# Altium PCB main_board4_PCB50Binary_2018-03-27.PcbDoc
Units mm, origin at the board's own origin, x right, y up, seen from the top; angles counter-clockwise.
Board outline 60.01 x 79.7 mm, 2 copper layers (Top Layer, Bottom Layer); 83 components, 64 nets, 366 pads, 23 vias.
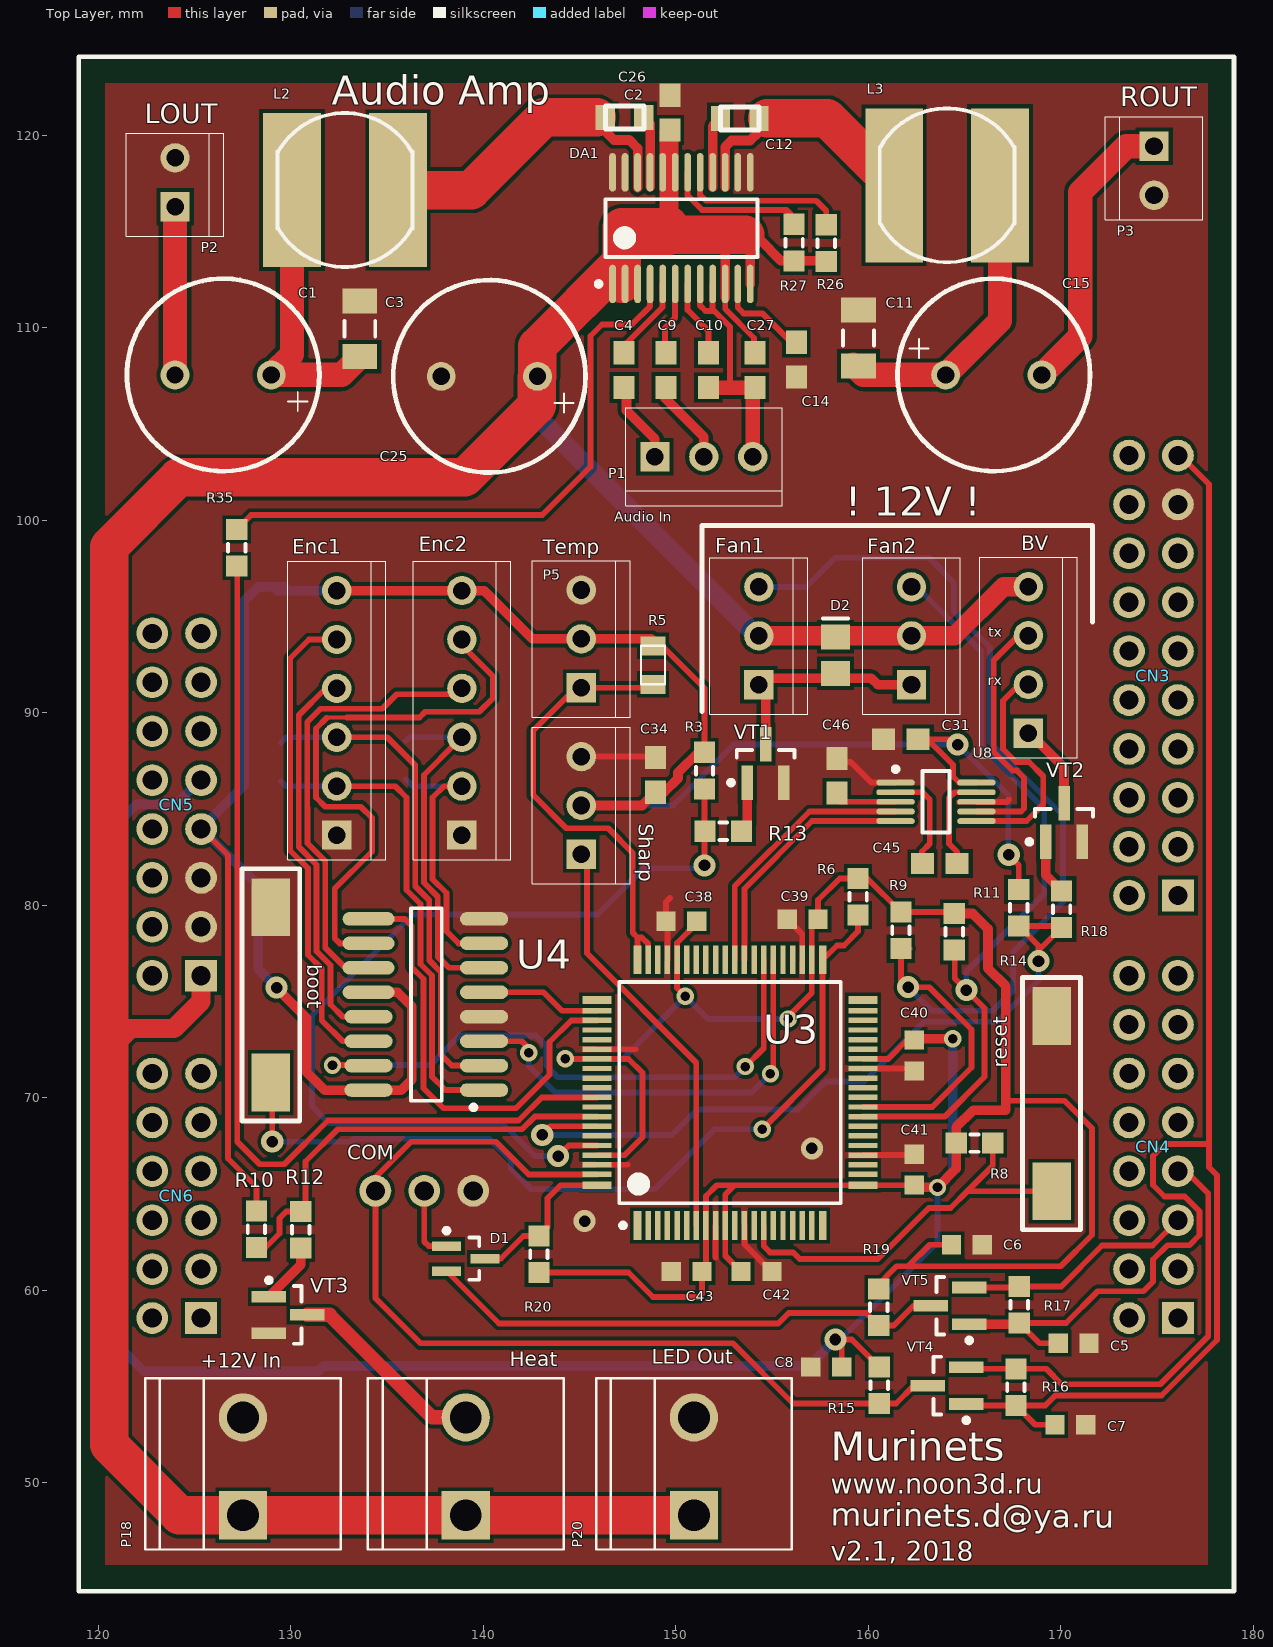
[diagram p0: Top Layer view]
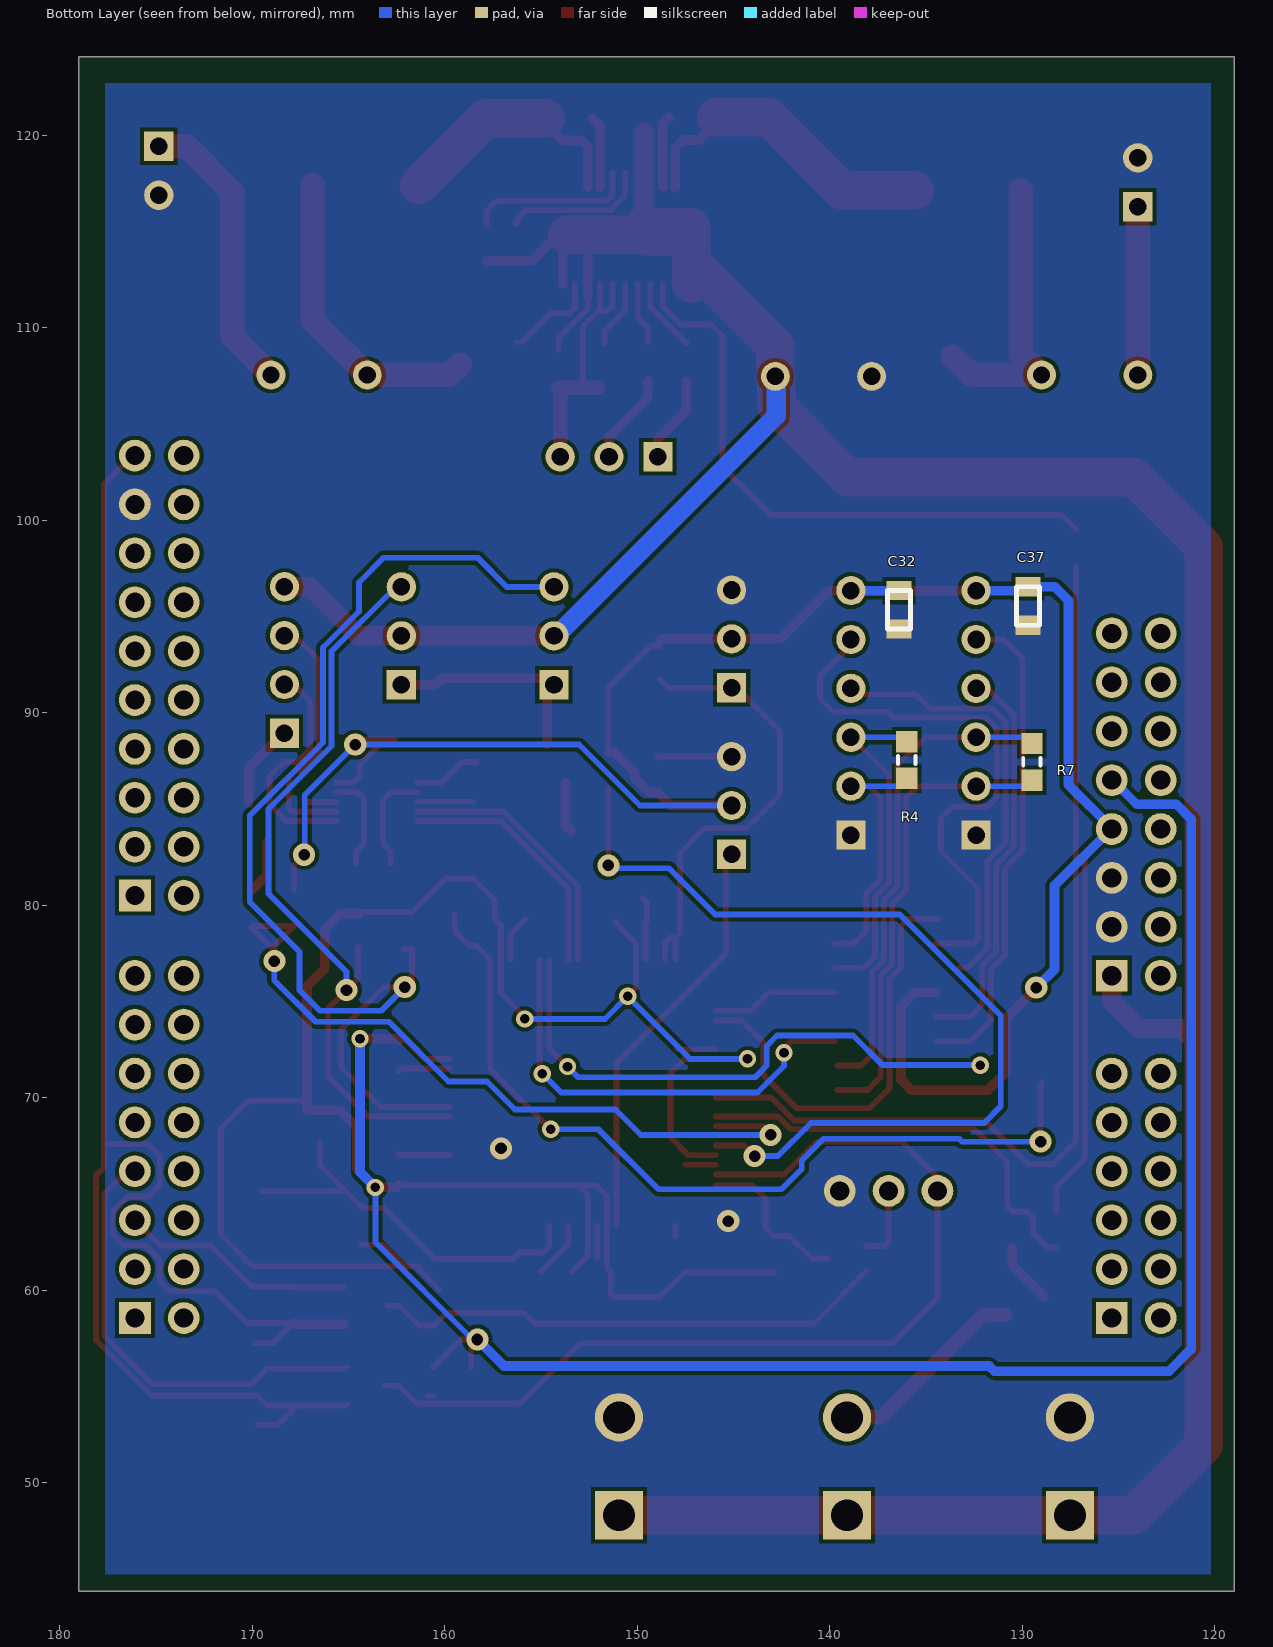
[diagram p1: Bottom Layer view, seen from below]

## Layer stack, top to bottom
Top Solder: solder mask 0.0102, Solder Resist, Dk 3.5
Top Layer: signal copper 0.0356
Dielectric 1: dielectric 0.32, FR-4, Dk 4.8
Bottom Layer: signal copper 0.0356
Bottom Solder: solder mask 0.0102, Solder Resist, Dk 3.5

## Board outline
119,44.375 119,124.075 179.006,124.075 179.006,44.375

## Design rules (kind name [scope] priority, off if disabled: settings)
Clearance Clearance_polygon [InPolygon] p1: gap=0.2 ignorepadtopadclearanceinfootprint=FALSE
Clearance [All] p2: gap=0.15 ignorepadtopadclearanceinfootprint=FALSE
PolygonConnect [IsPad And InNet('GND')] p1: connectstyle=Direct reliefconductorwidth=0.508 reliefentries=4 polygonreliefangle="90 Angle" airgapwidth=0.381
PolygonConnect ViaCon [IsVia And InNet('GND')] p2: connectstyle=Direct reliefconductorwidth=0.508 reliefentries=4 polygonreliefangle="90 Angle" airgapwidth=0.381
RoutingVias [All] p1: holewidth=0.6 width=1.15 viastyle="Through Hole" minholewidth=0.5 minwidth=1.15 maxholewidth=1 maxwidth=1.3 viatemplateguid#1={5399A165-F482-44B8-8C10-10F574C55520} viatemplatename#1=v08h40
SolderMaskExpansion [All] p1: expansion=0.102
Width [All] p1: maxlimit=5.81 minlimit=0.2 preferedwidth=0.305 minimp=50.000000 maximp=50.000000 favimp=50.000000
30 further rules are at their usual default settings.

## Components (designator, comment, footprint, x,y, rotation, side; value= is the part's Value field where it differs from the comment)
boot "chip button" "BUTTON SMD" 128.975,76.9 r270 top
BV "wf-4" WF-4 168.325,88.93 r90 top
C1 "470. x 25V" CAP+_D10_dip 128.998,107.55 r270 top
C2 "0,22" Cap_0805 146.35,120.925 r0 top
C3 "0.68" CAPC3216N 133.6,109.95 r270 top
C4 "1u" CAPC1608M 147.325,107.8 r90 top
C5 "0.1" CAPC1608N 170.675,57.25 r0 top
C6 "0.1" CAPC1608N 165.125,62.375 r0 top
C7 "0.1" CAPC1608N 170.5,53.025 r0 top
C8 "0.1" CAPC1608N 157.825,56.025 r180 top
C9 "1u" CAPC1608M 149.5,107.8 r270 top
C10 "1u" CAPC1608M 151.7,107.8 r90 top
C11 "0.68" CAPC3216N 159.5,109.475 r90 top
C12 "0,22" Cap_0805 152.325,120.875 r0 top
C14 "1u" CAPC1608M 156.275,108.35 r90 top
C15 "470. x 25V" CAP+_D10_dip 164.025,107.55 r90 top
C25 "470. x 25V" CAP+_D10_dip 142.825,107.475 r270 top
C26 "0.1" CAPC1608M 149.7,121.175 r270 top
C27 "2.2" CAPC1608M 154.125,107.8 r90 top
C31 "0.1" CAPC1608M 161.7,88.625 r0 top
C32 "0.1" Cap_0805 136.4,94.35 r90 bottom
C34 "Cap" CAPC1608M 148.95,86.775 r90 top
C37 "0.1" Cap_0805 129.7,94.55 r90 bottom
C38 "p" CAPC1608N 150.3,79.175 r0 top
C39 "p" CAPC1608N 156.6,79.275 r0 top
C40 "p" CAPC1608N 162.4,72.2 r90 top
C41 "p" CAPC1608N 162.4,66.275 r270 top
C42 "p" CAPC1608N 154.2,60.975 r180 top
C43 "p" CAPC1608N 150.575,60.975 r0 top
C45 "0.1" CAPC1608M 163.725,82.175 r180 top
C46 "p" CAPC1608M 158.375,86.725 r90 top
CN3 "conn_2x10_2.54" IDC2.54-2x10_V20C 174.82,91.935 r90 top
CN4 "conn_2x8_2.54" IDC2.54-2x8_V16C 174.82,67.455 r90 top locked
CN5 "conn_2x8_2.54" IDC2.54-2x8_V16C 124.08,85.235 r90 top
CN6 "conn_2x6_2.54" IDC2.54-2x6_V12C 124.08,66.185 r90 top locked
COM "3-pin" conn_3_2.54 138.225,65.175 r180 top
D1 "diode Schottky  BAT54AW" SOT323-3AM 139.1,61.65 r0 top
D2 "MBRS330" CD2012-0805 158.3,93 r90 top
DA1 "TPA3123D2" TSOP65P640-24AM 150.3,115.175 r90 top
Enc1 "6-pin" WF-6 132.4,83.65 r90 top (schematic designator enc1)
Enc2 "6-pin" WF-6 138.9,83.65 r90 top (schematic designator enc2)
Fan1 "3-pin" wf-3 154.325,91.46 r90 top
Fan2 "3-pin" wf-3 162.25,91.46 r90 top
Heat "MPW-2" MPW-2 139.1,48.32 r90 top
L2 "22 мкГн" SDR0805 135.575,117.156 r180 top
L3 "22 мкГн" SDR0805 161.35,117.4 r0 top
P1 "WF-3" WF-3 148.925,103.3 r0 top
P2 "WF2" WF-2 124,116.285 r90 top
P3 "WF2" WF-2 174.85,119.425 r270 top
P5 "WF-3" WF-3 145.1,91.3 r90 top
P18 "MPW-2" MPW-2 127.525,48.32 r90 top
P20 "MPW-2" MPW-2 150.95,48.32 r90 top
R3 "4,7K" RESC1608M 151.5,87 r90 top
R4 "100" RESC1608M 136,87.55 r90 bottom
R5 "10k" Res_0805 148.825,91.475 r90 top
R6 "510" RESC1608M 159.475,80.45 r90 top
R7 "100" RESC1608M 129.5,87.45 r90 bottom
R8 "510" RESC1608M 165.525,67.65 r180 top
R9 "100" RESC1608M 161.7,78.7 r90 top
R10 "4,7K" RESC1608M 128.225,63.175 r90 top
R11 "100" RESC1608M 164.475,78.625 r90 top
R12 "4,7K" RESC1608M 130.525,63.15 r270 top
R13 "4,7K" RESC1608M 152.475,83.85 r0 top
R14 "4,7K" RESC1608M 167.825,79.875 r90 top
R15 "10K" RESC1608M 160.575,55.075 r90 top
R16 "10K" RESC1608M 167.675,54.975 r270 top
R17 "10K" RESC1608M 167.85,59.25 r270 top
R18 "4,7K" RESC1608M 170.05,79.8 r90 top
R19 "10K" RESC1608M 160.55,59.125 r90 top
R20 "10K" RESC1608M 142.9,61.875 r270 top
R26 "10k" RESC1608M 157.825,114.4 r90 top
R27 "10k" RESC1608M 156.15,114.425 r90 top
R35 "10k" RESC1608M 127.2,98.575 r90 top
reset "chip button" "BUTTON SMD" 169.525,71.25 r270 top
Sharp "WF-3" WF-3 145.1,82.645 r90 top
U3 "LPC1758FBD80" SOT315-1_V 152.825,70.275 r90 top
U4 "SN65C1167" "SOIC127P600-16M - INCREASE WIDTH" 137.05,74.85 r180 top
U8 "ADM101E" TSSOP50P490-10AM 163.525,85.375 r0 top
VT1 "IRFML8244" SOT23-3M 154.675,87.375 r90 top
VT2 "IRFML8244" SOT23-3M 170.175,84.3 r90 top
VT3 "IRFML8244" SOT23-3M 129.875,58.725 r0 top
VT4 "BSS138" SOT23-3M 164.1,55.05 r180 top
VT5 "BSS138" SOT23-3M 164.25,59.2 r180 top

## Footprints (in the part's own frame and the unit in brackets; to place one, negate y for a bottom-side part, rotate by r counter-clockwise, add the part's x,y. Pads: shape width x height; smd on the part's side, far side on the other; paste and mask are expansions set on the pad)
"BUTTON SMD" [mm]
  rect 3x2 smd: 1(6.1,0) 2(-3,0)
  silkscreen extent -5,-1.5 8.1,1.5, body extent -5,-1.5 8.1,1.5, height 5
CAP+_D10_dip [mm]
  round 1.5 hole 0.9: 1(0,0) 2(0,-5)
  silkscreen extent -5,-7.5 5,2.5
Cap_0805 [mm] "Type 0805"
  rect 1x1.3 smd: 1(0,0) 2(2,0)
  silkscreen extent 0,-0.6 2,0.6
CAPC1608M [mm] "Chip Capacitor, Body 1.6x0.8mm, IPC Low Density"
  rect 1.2x1.1 smd: 1(-0.9,0) 2(0.9,0)
  body extent -0.87,-0.48 0.87,0.48, height 0.85
CAPC1608N [mm] "Chip Capacitor, Body 1.6x0.8mm, IPC Medium Density"
  rect 1x1 smd: 1(-0.8,0) 2(0.8,0)
  body extent -0.87,-0.48 0.87,0.48, height 0.85
CAPC3216N [mm] "Chip Capacitor, Body 3.2x1.6mm, IPC Medium Density"
  rect 1.3x1.8 smd: 1(-1.45,0) 2(1.45,0)
  silkscreen extent -0.4,-0.8 0.4,0.8, body extent -1.7,-0.9 1.7,0.9, height 1.35
CD2012-0805 [mm] "Chip Diode; Body 2.0 x 1.3 mm (LxW typ)"
  rect 1.3x1.5 smd: 1(-0.95,0) 2(0.95,0)
  silkscreen extent 1.9,-0.65 1.9,0.65
conn_3_2.54 [mm] "connector 2.54"
  round 1.65 hole 1: 1(-1.26,0.01) 2(1.28,0.01) 3(3.82,0.01)
  body extent -2.53,-1.26 5.18,1.28, height 8.54
IDC2.54-2x6_V12C [mm] "Connector; IDC, PCB Transition - 2 Rows, Thru-Hole; 12 Position; Vertical; Pitch 2.54 mm; Body 23.08 x 6.1 x 7.45 mm (LxWxH), Kinked Contacts"
  rect 1.65x1.65 hole 1: 1(-7.62,-1.27)
  round 1.65 hole 1: 2(-7.62,1.27) 3(-5.08,-1.27) 4(-5.08,1.27) 5(-2.54,-1.27) 6(-2.54,1.27) 7(0,-1.27) 8(0,1.27) 9(2.54,-1.27) 10(2.54,1.27) 11(5.08,-1.27) 12(5.08,1.27)
IDC2.54-2x8_V16C [mm] "Connector; IDC, PCB Transition - 2 Rows, Thru-Hole; 16 Position; Vertical; Pitch 2.54 mm; Body 25.62 x 6.1 x 7.45 mm (LxWxH), Kinked Contacts"
  rect 1.65x1.65 hole 1: 1(-8.89,-1.27)
  round 1.65 hole 1: 2(-8.89,1.27) 3(-6.35,-1.27) 4(-6.35,1.27) 5(-3.81,-1.27) 6(-3.81,1.27) 7(-1.27,-1.27) 8(-1.27,1.27) 9(1.27,-1.27) 10(1.27,1.27) 11(3.81,-1.27) 12(3.81,1.27) 13(6.35,-1.27) 14(6.35,1.27) 15(8.89,-1.27) 16(8.89,1.27)
IDC2.54-2x10_V20C [mm] "Connector; IDC, PCB Transition - 2 Rows, Thru-Hole; 20 Position; Vertical; Pitch 2.54 mm; Body 30.74 x 6.1 x 7.45 mm (LxWxH), Kinked Contacts"
  rect 1.65x1.65 hole 1: 1(-11.43,-1.27)
  round 1.65 hole 1: 2(-11.43,1.27) 3(-8.89,-1.27) 4(-8.89,1.27) 5(-6.35,-1.27) 6(-6.35,1.27) 7(-3.81,-1.27) 8(-3.81,1.27) 9(-1.27,-1.27) 10(-1.27,1.27) 11(1.27,-1.27) 12(1.27,1.27) 13(3.81,-1.27) 14(3.81,1.27) 15(6.35,-1.27) 16(6.35,1.27) 17(8.89,-1.27) 18(8.89,1.27) 19(11.43,-1.27) 20(11.43,1.27)
MPW-2 [mm]
  rect 2.5x2.5 hole 1.65: 1(0,0)
  round 2.5 hole 1.65: 2(5.08,0)
  silkscreen extent -1.78,-5.08 7.11,5.08
Res_0805 [mm] "Type 0805"
  rect 1x1.3 smd: 1(0,0) 2(2,0)
  silkscreen extent 0,-0.63 2,0.63
RESC1608M [mm] "Chip Resistor, Body 1.6x0.8mm, IPC Low Density"
  rect 1.1x1.1 smd: 1(-0.95,0) 2(0.95,0)
  silkscreen extent -0.2,-0.45 0.2,0.45, body extent -0.85,-0.48 0.85,0.48, height 0.6
SDR0805 [mm] "SDR 0805 series"
  rect 3x8 smd: 1(0,0) 2(5.5,0)
  silkscreen extent -0.75,-4 6.25,4
"SOIC127P600-16M - INCREASE WIDTH" [mm] "SOIC, 16-Leads, Body 9.9x3.9mm, Pitch 1.27mm, IPC Low Density"
  oval 2.5x0.7 smd: 1(-3,4.445) 2(-3,3.175) 3(-3,1.905) 4(-3,0.635) 5(-3,-0.635) 6(-3,-1.905) 7(-3,-3.175) 8(-3,-4.445) 13(3,0.635) 14(3,1.905) 15(3,3.175) 16(3,4.445)
  oval 2.7x0.7 smd: 9(3,-4.445) 10(3,-3.175) 11(3,-1.905) 12(3,-0.635)
  silkscreen extent -2.58,-5 0.8,5.47, body extent -2,-5 2,5, height 1.75
SOT23-3M [mm] "SOT23, 3-Leads, Body 2.9x1.3mm, Pitch 0.95mm, Lead Span 2.5mm, IPC Low Density"
  rect 1.8x0.6 smd: 1(-1,0.95) 2(-1,-0.95) 3(1,0)
  silkscreen extent -1.12,-1.5 0.7,1.92, body extent -0.7,-1.5 0.7,1.5, height 1.1
SOT315-1_V [mm] "Thin QFP, 80-Leads, Body 12x12mm, Pitch 0.5mm, NXP Recommended"
  rect 1.5x0.4 smd: 1(-6.9,4.81) 20(-6.9,-4.81) 41(6.9,-4.81) 60(6.9,4.81)
  rect 1.5x0.28 smd: 2(-6.9,4.25) 3(-6.9,3.75) 4(-6.9,3.25) 5(-6.9,2.75) 6(-6.9,2.25) 7(-6.9,1.75) 8(-6.9,1.25) 9(-6.9,0.75) 10(-6.9,0.25) 11(-6.9,-0.25) 12(-6.9,-0.75) 13(-6.9,-1.25) 14(-6.9,-1.75) 15(-6.9,-2.25) 16(-6.9,-2.75) 17(-6.9,-3.25) 18(-6.9,-3.75) 19(-6.9,-4.25) 42(6.9,-4.25) 43(6.9,-3.75) 44(6.9,-3.25) 45(6.9,-2.75) 46(6.9,-2.25) 47(6.9,-1.75) 48(6.9,-1.25) 49(6.9,-0.75) 50(6.9,-0.25) 51(6.9,0.25) 52(6.9,0.75) 53(6.9,1.25) 54(6.9,1.75) 55(6.9,2.25) 56(6.9,2.75) 57(6.9,3.25) 58(6.9,3.75) 59(6.9,4.25)
  rect 0.4x1.5 smd: 21(-4.81,-6.9) 40(4.81,-6.9) 61(4.81,6.9) 80(-4.81,6.9)
  rect 0.28x1.5 smd: 22(-4.25,-6.9) 23(-3.75,-6.9) 24(-3.25,-6.9) 25(-2.75,-6.9) 26(-2.25,-6.9) 27(-1.75,-6.9) 28(-1.25,-6.9) 29(-0.75,-6.9) 30(-0.25,-6.9) 31(0.25,-6.9) 32(0.75,-6.9) 33(1.25,-6.9) 34(1.75,-6.9) 35(2.25,-6.9) 36(2.75,-6.9) 37(3.25,-6.9) 38(3.75,-6.9) 39(4.25,-6.9) 62(4.25,6.9) 63(3.75,6.9) 64(3.25,6.9) 65(2.75,6.9) 66(2.25,6.9) 67(1.75,6.9) 68(1.25,6.9) 69(0.75,6.9) 70(0.25,6.9) 71(-0.25,6.9) 72(-0.75,6.9) 73(-1.25,6.9) 74(-1.75,6.9) 75(-2.25,6.9) 76(-2.75,6.9) 77(-3.25,6.9) 78(-3.75,6.9) 79(-4.25,6.9)
  silkscreen extent -7.02,-5.75 5.75,5.75, body extent -6,-6 6,6, height 1.6
SOT323-3AM [mm] "SOT323, 3-Leads, Body 2.0x1.3mm, Pitch 0.65mm, Lead Span 2.1mm, IPC Low Density"
  rect 1.5x0.5 smd: 1(-1,0.65) 2(-1,-0.65) 3(1,0)
  silkscreen extent -1.12,-1.1 0.7,1.57, body extent -0.7,-1.1 0.7,1.1, height 1
TSOP65P640-24AM [mm] "TSOP, 24-Leads, Body 7.8x4.4mm, Pitch 0.65mm, IPC Low Density"
  oval 2x0.35 smd: 1(-2.9,3.575) 2(-2.9,2.925) 3(-2.9,2.275) 4(-2.9,1.625) 5(-2.9,0.975) 6(-2.9,0.325) 7(-2.9,-0.325) 8(-2.9,-0.975) 9(-2.9,-1.625) 10(-2.9,-2.275) 11(-2.9,-2.925) 12(-2.9,-3.575) 13(2.9,-3.575) 14(2.9,-2.925) 15(2.9,-2.275) 16(2.9,-1.625) 17(2.9,-0.975) 18(2.9,-0.325) 19(2.9,0.325) 20(2.9,0.975) 21(2.9,1.625) 22(2.9,2.275) 23(2.9,2.925) 24(2.9,3.575)
  silkscreen extent -3.02,-3.95 1.5,4.42, body extent -2.25,-3.95 2.25,3.95, height 1.1
TSSOP50P490-10AM [mm] "TSSOP, 10-Leads, Body 3x3mm, Pitch 0.5mm, IPC Low Density"
  oval 2x0.3 smd: 1(-2.1,1) 2(-2.1,0.5) 3(-2.1,0) 4(-2.1,-0.5) 5(-2.1,-1) 6(2.1,-1) 7(2.1,-0.5) 8(2.1,0) 9(2.1,0.5) 10(2.1,1)
  silkscreen extent -2.22,-1.6 0.7,1.82, body extent -1.6,-1.6 1.6,1.6, height 1.1
WF-2 [mil]
  rect 60x60 hole 36: 1(0,0)
  round 60 hole 36: 2(100,0)
  silkscreen extent -60,-100 150,100, body extent -60,-100 150,100, height 394
wf-3 [mil]
  rect 60x60 hole 36: 1(0,0)
  round 60 hole 36: 2(100,0) 3(200,0)
  silkscreen extent -60,-100 260,100, body extent -60,-100 260,100, height 394
WF-3 [mil]
  rect 60x60 hole 36: 1(0,0)
  round 60 hole 36: 2(100,0) 3(200,0)
  silkscreen extent -60,-100 260,100, body extent -60,-100 260,100, height 394
WF-4 [mil]
  rect 60x60 hole 36: 1(0,0)
  round 60 hole 36: 2(100,0) 3(200,0) 4(300,0)
  silkscreen extent -50,-100 360,100, body extent -50,-100 360,100, height 394
WF-6 [mil]
  rect 60x60 hole 36: 1(0,0)
  round 60 hole 36: 2(100,0) 3(200,0) 4(300,0) 5(400,0) 6(500,0)
  silkscreen extent -50,-100 560,100, body extent -50,-100 560,100, height 394

## Part data
BV: library part 4-pin
C1 C15 C25: library part Cap+, "Tantalum and aluminium electrolytic capacitors"
C2 C4 C5 C6 C7 C8 C9 C10 C12 C14 C26 C27 C31 C32 C37 C45: library part Cap, "Ceramic capacitors"
C3 C11: library part CPER_10NF_400V_10%_500-300X720X650, "Non-polarised capacitor"
C34: "Capacitor"
C38 C39 C40 C41 C42 C43 C46: library part Cap, "Capacitor"
D1: "Schottky BAT54AW"
D2: library part MBRS360T3
DA1: "25-W STEREO CLASS-D AUDIO POWER AMPLIFIER"
L2 L3: library part Ind, "Coils"
R3 R4 R5 R6 R7 R8 R9 R10 R11 R12 R13 R14 R15 R16 R17 R18 R19 R20 R26 R27 R35: library part Res, "Ceramic resisors"
U3: "32-bit ARM Cortex-M3 MCU, 512 kB Flash, 64 kB SRAM, 100 MHz, USB 2.0 Device/Host/OTG, Ethernet, CAN, 12-Bit ADC, DAC, I2S, 80-Pin LQFP"
U4: "RS-422 Dual Differential Drivers and Receivers"
U8: "Tiny RS-232 Transceiver"
VT1 VT2 VT3: "MOSFET N"
VT4 VT5: library part IRFML8244, "MOSFET N"

## Via types
v1: diameter 1.15, hole 0.6, Top Layer to Bottom Layer, 13 vias
v2: diameter 0.9, hole 0.5, Top Layer to Bottom Layer, 10 vias

## Nets (pads, with @x,y where several pads share a name; then routed paths per layer and width w, separated by ;. In a path a pad name is that pad's centre, name@x,y a point inside that pad or via, vN(x,y) a via of type N, cw(c..) or ccw(c..) an arc to the next point about the centre after c; other vN are vias at no path point)
1.8: C5.1 C7.1 CN3.19 R16.2 R17.2 VT4.1 VT5.1 | length 89.7
  Top Layer w0.3: VT4.1 165.175,54.025 R16.2 ; C7.1 168.675,53.025 R16.2 ; C5.1 168.9,57.25 R17.2 170.275,58.3 171.925,59.95 174.3,59.95 174.8,60.45 174.8,61.6 175.55,62.35 176.69,62.35 177.215,62.875 177.215,64.111 176.451,64.875 175.4,64.875 174.8,65.475 174.8,66.975 175.425,67.6 177.65,67.6 177.7,67.65 ; CN3.19 176.21,103.365 177.7,101.875 177.7,67.65 ; R16.2 169.2,54.025 169.717,54.543 175.232,54.543 178.115,57.425 178.115,65.985 177.7,66.4 177.7,67.65
  Top Layer w0.5: VT5.1 167.8,58.25 R17.2
+3.3: C6.1 C8.1 C38.2 C39.2 C40.2 C41.2 C42.2 C43.2 CN5.9 R6.2 R8.2 R9.2 R11.2 R15.2 R19.2 R20.2 U3.8 U3.10 U3.21 U3.34 U3.42 U3.56 U3.67 U3.77 | length 217.7
  Top Layer w0.3: R20.2 147.55,60.925 148.825,59.65 151.2,59.65 151.375,59.825 C43.2 151.575,61.175 U3.8 151.575,64.9 152.14,65.465 153.065,65.465 ; v2(144.275,72.025) U3.67 147.55,72.025 148.275,71.3 148.275,67.95 147.35,67.025 U3.77 ; v2(150.5,75.275) 150.075,75.7 U3.56 150.075,78.05 151.1,79.075 C38.2 ; C42.2 152.575,61.8 U3.10 152.575,64.975 153.065,65.465 ; v2(155.85,74.1) 155.85,74.225 157.075,75.45 U3.42 157.075,78.95 C39.2 157.4,80.275 158.525,81.4 R6.2 159.95,81.4 R9.2 164.4,79.65 R11.2 ; C8.1 158.625,57.125 v1(158.3,57.45) 159.15,57.45 R15.2 ; U3.34 161.05,72.025 162.025,73 C40.2 ; R19.2@160.3,60.075 161.475,61.25 162.075,61.25 ; C41.2@162.39,65.465 U3.21 153.065,65.465 ; C6.1 163.2,62.375 162.075,61.25 ; 167.15,69.85 170.2,69.85 171.625,68.425 171.625,62.875 170,61.25 162.075,61.25
  Top Layer w0.5: C41.2 162.527,65.348 v2(163.6,65.348) 164.575,66.323 R8.2 164.575,68.475 165.45,69.35 167.15,69.35 167.15,69.85 167.15,75.8 166.225,76.725 166.225,78.775 165.425,79.575 R11.2 ; C40.2 162.475,73.075 v2(164.4,73.075)
  Bottom Layer w0.3: v2(144.275,72.025) 147.25,72.025 v2(150.5,75.275) 151.675,74.1 v2(155.85,74.1) ; v1(158.3,57.45) 158.55,57.45 163.6,62.5 v2(163.6,65.348)
  Bottom Layer w0.5: CN5.9@125.35,86.545 124.055,85.25 122,85.25 121.225,84.475 121.225,56.95 122.375,55.8 131.45,55.8 131.725,56.075 156.925,56.075 v1(158.3,57.45) ; v2(163.6,65.348) 164.4,66.148 v2(164.4,73.075)
+5: C31.2 C32.2 C34.1 C37.2 CN5.7 Enc1.6 Enc2.6 P5.2 R3.2 R5.2 R10.2 R14.2 Sharp.2 U4.12 U4.16 U8.10 | length 136.7
  Top Layer w0.3: CN5.7@125.35,84.005 126.75,82.605 126.75,66.85 128.225,65.375 R10.2 ; R5.2 149.3,93.475 151.5,91.275 R3.2 ; C31.2 C31.2@163.087,88.625 ; v1(164.65,88.35) 164.375,88.625 C31.2@163.087,88.625 ; U8.10 164.725,86.375 164.412,86.688 164.412,87.3 C31.2@163.087,88.625 ; v1(167.3,82.625) 167.825,82.1 R14.2
  Top Layer w0.5: v1(129.275,75.725) 129.325,75.775 129.35,75.775 129.35,75.625 130.825,74.15 130.825,71.35 131.77,70.405 U4.16 135.755,70.405 136.3,70.95 136.3,74.75 135.565,75.485 U4.12@134.5,75.485 ; Enc1.6 Enc2.6 140.05,96.35 142.56,93.84 P5.2 148.735,93.84 R5.2@148.825,93.75 ; Sharp.2 148.26,85.185 C34.1 149.4,85.875 150.125,86.6 150.125,86.9 151.175,87.95 R3.2
  Bottom Layer w0.3: Sharp.2 149.86,85.185 153.025,88.35 v1(164.65,88.35) 167.275,85.725 167.275,82.6 v1(167.3,82.625)
  Bottom Layer w0.5: v1(129.275,75.725) 128.325,76.675 128.325,81.03 125.35,84.005 127.6,86.255 127.6,95.825 128.325,96.55 C37.2 ; C37.2@129.3,96.35 Enc1.6 ; C32.2 Enc2.6
+12: BV.4 C25.1 C26.2 C27.2 CN5.1 D2.2 DA1.1 DA1.2 DA1.3 DA1.10 DA1.12 DA1.19 DA1.20 Fan1.2 Fan2.2 Heat.1 P18.1 P20.1 R26.1 R27.1 | length 184
  Top Layer w0.3: DA1.10@152.575,111.575 152.575,110.975 154.075,109.475 154.075,108.875 C27.2@154.1,108.85
  Top Layer w0.5: DA1.10@152.575,111.575 DA1.10 152.575,114.45 ; DA1.12 153.875,114.575 154.375,114.575 155.475,113.475 R27.1 R26.1@157.8,113.475
  Top Layer w1: 120.575,72.475 121.7,73.6 123.95,73.6 125.35,75 CN5.1 ; 149.65,115.325 C26.2@149.65,120.175 ; Fan1.2 157.15,94 ; 156.775,94 Fan2.2 164.475,94 167.025,96.55 BV.4
  Top Layer w2: DA1.2@147.2,112.275 147.2,113.425 ; 147.975,114.9 147.2,114.125 ; 149.65,115.325 149.55,115.225 ; P20.1 Heat.1 P18.1 124.23,48.32 120.575,51.975 120.575,72.475 120.575,98.625 124.175,102.225 139.05,102.225 142.775,105.95 142.775,107.425 C25.1 142.825,109.05 147.2,113.425 ; 153.627,114.823 149.952,114.823 149.55,115.225 ; 147.2,113.425 147.2,114.125 ; 147.2,114.125 147.2,115.225 149.55,115.225
  Top Layer w2.3: 147.975,114.9 149.55,114.9
  Bottom Layer w1: C25.1 142.775,107.425 142.775,105.425 Fan1.2@154.2,94
boot: boot.1 R6.1 U3.41 | length 44.7
  Top Layer w0.3: boot.1 129.05,70.725 v1(129.05,67.725) ; v2(154.5,68.375) 157.635,71.51 U3.41 158.38,77.92 158.745,77.92 159.475,78.65 R6.1
  Bottom Layer w0.3: v1(129.05,67.725) 133.125,67.725 133.278,67.878 140.325,67.878 141.45,66.753 141.45,66.3 142.5,65.25 148.9,65.25 152.025,68.375 v2(154.5,68.375)
BV_gnd: BV.1 VT2.3 | length 4.5
  Top Layer w0.5: BV.1@168.325,89 170.175,87.15 VT2.3
BV_pwr: R14.1 R18.1 U3.74 | length 39.4
  Top Layer w0.3: v1(143.075,68.075) 143.525,68.525 ; 143.475,68.525 143.525,68.525 ; U3.74 143.525,68.525 ; v1(168.85,77.1) v1@168.85,77.65 ; v1@168.85,77.65 R18.1 169.975,78.925 R14.1 168.85,77.9 v1@168.85,77.65
  Bottom Layer w0.3: v1(143.075,68.075) 149.8,68.075 151.125,69.4 156.35,69.4 157.8,70.85 159.8,70.85 162.9,73.95 166.7,73.95 168.85,76.1 v1(168.85,77.1)
bv_rs232_rx: BV.2 U8.6 | length 12.2
  Top Layer w0.3: U8.6 168.225,84.375 169.1,85.25 169.1,86.7 168.35,87.45 167.675,87.45 167,88.125 167,90.625 167.915,91.54 BV.2@168.37,91.54
bv_rs232_tx: BV.3 U8.7 | length 13.4
  Top Layer w0.3: U8.7 167.95,84.875 168.1,85.025 168.1,86.625 167.725,87 167.489,87 166.525,87.964 166.525,92.725 167.88,94.08 BV.3@168.325,94.08
bv_uart_rx: U3.49 U8.5 | length 13
  Top Layer w0.3: U3.49 153.575,80.864 157.086,84.375 U8.5
bv_uart_tx: U3.50 U8.4 | length 13.8
  Top Layer w0.3: U3.50 153.075,81 156.95,84.875 U8.4
deb_uart_tx: COM.2 D1.1 | length 3.9
  Top Layer w0.3: COM.2 136.945,62.53 137.175,62.3 D1.1
enc1_data: U3.46 U4.3 | length 23.2
  Top Layer w0.3: U4.3@139.75,72.945 U4.3 142.005,72.945 142.375,72.575 v2(142.375,72.35) ; v2(154.925,71.25) 155.075,71.4 U3.46
  Bottom Layer w0.3: v2(142.375,72.35) 142.375,71.65 143.75,70.275 153.95,70.275 v2(154.925,71.25)
enc1_sck: U3.47 U4.15 | length 31.9
  Top Layer w0.3: v2(132.175,71.7) 134.325,71.7 U4.15@134.35,71.675 ; v2(153.625,71.625) 154.575,72.575 U3.47
  Bottom Layer w0.3: v2(132.175,71.7) 137.25,71.7 138.787,73.237 142.737,73.237 143.275,72.7 143.275,71.675 143.875,71.075 153.075,71.075 v2(153.625,71.625)
enc1in_N: Enc1.2 R7.1 U4.1 | length 24.5
  Top Layer w0.3: Enc1.2 135.435,86.19 136.025,85.6 136.025,80.8 136.75,80.075 136.75,76.957 137.35,76.357 137.35,71.1 138.045,70.405 U4.1@139.6,70.405
  Bottom Layer w0.3: R7.1@129.5,86.45 129.76,86.19 Enc1.2
enc1in_P: Enc1.3 R7.2 U4.2 | length 25.3
  Top Layer w0.3: Enc1.3 135.02,88.73 136.475,87.275 136.475,80.986 137.2,80.261 137.2,77.144 137.8,76.544 137.8,72.25 138.375,71.675 U4.2@139.6,71.675
  Bottom Layer w0.3: R7.2@129.5,88.45 129.78,88.73 Enc1.3
enc1out_N: Enc1.4 U4.13 | length 21
  Top Layer w0.3: Enc1.4 131.813,91.27 130.421,89.878 130.421,84.893 130.425,84.889 130.425,83.039 131.35,82.114 131.35,77.614 132.075,76.889 132.075,74.85 132.71,74.215 U4.13 U4.13@134.5,74.215
enc1out_P: Enc1.5 U4.14 | length 25.6
  Top Layer w0.3: Enc1.5 130.96,93.81 129.971,92.821 129.971,84.054 129.975,84.05 129.975,82.852 130.9,81.927 130.9,77.427 131.625,76.702 131.625,74.025 132.705,72.945 U4.14 U4.14@134.5,72.945
enc2_data: U3.62 U4.5 | length 6.6
  Top Layer w0.3: U4.5@139.75,75.485 U4.5 143.14,75.485 144.1,74.525 U3.62
enc2_sck: U3.63 U4.9 | length 23.1
  Top Layer w0.3: U4.9@134.35,79.295 135.93,79.295 136.3,78.925 136.3,76.771 136.9,76.171 136.9,70.5 137.937,69.462 141.712,69.462 143.45,71.2 143.45,72.9 144.575,74.025 U3.63
enc2in_N: Enc2.2 R4.1 U4.7 | length 14
  Top Layer w0.3: Enc2.2 137.965,86.19 137.375,85.6 137.375,81.359 138.1,80.634 138.1,78.65 138.725,78.025 U4.7@139.75,78.025
  Bottom Layer w0.3: R4.1@136,86.55 136.36,86.19 Enc2.2
enc2in_P: Enc2.3 R4.2 U4.6 | length 17.7
  Top Layer w0.3: Enc2.3@138.9,88.43 138.58,88.43 136.925,86.775 136.925,81.173 137.65,80.448 137.65,77.33 138.225,76.755 U4.6@139.75,76.755
  Bottom Layer w0.3: R4.2@136,88.55 136.18,88.73 Enc2.3
enc2out_N: Enc2.4 U4.11 | length 22.6
  Top Layer w0.3: U4.11@133.275,76.755 132.845,76.755 131.8,77.8 131.8,82.3 130.875,83.225 130.875,85.075 130.871,85.079 130.871,89.521 131.558,90.208 134.758,90.208 135.52,90.97 Enc2.4@138.9,90.97
enc2out_P: Enc2.5 U4.10 | length 29.5
  Top Layer w0.2: 131.883,89.741 131.892,89.75 132.925,89.75
  Top Layer w0.3: 131.883,89.741 131.321,89.179 131.321,85.604 131.8,85.125 133.65,85.125 134.225,84.55 134.225,82.8 132.3,80.875 132.3,78.275 132.55,78.025 U4.10 U4.10@134.5,78.025 ; 132.925,89.75 136.7,89.75 137,90.05 139.8,90.05 140.5,90.75 140.5,91.91 Enc2.5@138.9,93.51
Fan: R3.1 R13.1 U3.76 | length 48.4
  Top Layer w0.3: v1(143.9,66.975) 144.45,67.525 U3.76 ; v1(151.5,82.075) 151.5,83.875 R3.1
  Bottom Layer w0.3: v1(143.9,66.975) 142.7,66.975 140.975,68.7 131.975,68.7 131.113,69.562 131.113,74.275 136.363,79.525 145.95,79.525 148.35,81.925 151.35,81.925 v1(151.5,82.075)
G0: DA1.17 R26.2 | length 8.8
  Top Layer w0.305: DA1.17 151.275,116.9 151.575,116.6 157.3,116.6 157.825,116.075 R26.2
G1: DA1.18 R27.2 | length 7.6
  Top Layer w0.305: DA1.18 150.625,116.875 151.375,116.125 155.75,116.125 156.275,115.6 R27.2@156.275,115.375
GND: boot.2 C3.1 C5.2 C6.2 C7.2 C8.2 C11.2 C14.1 C25.2 C26.1 C31.1 C32.1 C34.2 C37.1 C38.1 C39.1 C40.1 C41.1 C42.1 C43.1 C46.2 CN3.17 CN5.3 CN5.5 COM.1 DA1.13 DA1.14 DA1.23 DA1.24 Enc1.1 Enc2.1 P2.2 P3.2 P5.3 P18.2 P20.2 reset.2 Sharp.3 U3.9 U3.12 U3.24 U3.33 U3.43 U3.57 U3.66 U3.78 U4.4 U4.8 U8.1 U8.8 VT1.2 VT2.2 VT3.2 | length 28.5
  Top Layer w0.305: Sharp.3 148.9,87.725 C34.2 ; U3.78 147.5,66.525 ; U3.66 147.925,72.525 ; U3.57 149.575,79.1 C38.1 149.5,80.175 149.7,80.375 ; 152.075,61.703 U3.9 ; U3.12 153.575,62.4 C42.1 ; C39.1 156.575,78.5 U3.43 ; C46.2@158.375,87.45 159.1,87.45 160.175,86.375 U8.1 ; U3.24 162.35,67.025 C41.1 ; U3.33 162.275,71.525 C40.1 ; U8.8 167.2,85.375 167.325,85.5
  other v1: 145.275,63.6 157.075,67.375
Heat: R10.1 R12.1 U3.73 | length 22.3
  Top Layer w0.3: R10.1 128.7,62.225 129.425,62.95 129.425,63.75 129.775,64.1 R12.1 ; R12.1@130.525,64.125 130.775,64.375 130.775,66.7 132.45,68.375 137.475,68.375 142.028,68.375 142.678,69.025 U3.73
L_OUT: C1.2 P2.1 | length 8.7
  Top Layer w1.27: C1.2 123.998,116.283 P2.1
LINE_OUTA: C4.1 P1.1 | length 4.5
  Top Layer w0.5: C4.1@147.45,107.2 147.45,105.7 148.925,104.225 P1.1
LINE_OUTB: C9.2 P1.2 | length 4.8
  Top Layer w0.5: C9.2@149.45,107.225 149.45,106.35 151.465,104.335 P1.2
LPC_RX_HV: D1.3 R20.1 U3.80 | length 8.3
  Top Layer w0.3: D1.3 140.925,61.65 142.1,62.825 R20.1 143.343,63.267 143.343,64.783 144.025,65.465 U3.80
LPC_TX_HV: COM.3 R15.1 U3.79 VT4.3 | length 50.9
  Top Layer w0.3: U3.79 142.375,66.025 140.675,67.725 136.25,67.725 134.405,65.88 COM.3 134.405,59.595 136.75,57.25 152.975,57.25 156.1,54.125 R15.1 161.45,54.125 162.375,55.05 VT4.3 ; R15.1@160.575,54.525 R15.1@160.875,54.525
LPC_TX_LV: CN4.7 R16.1 VT4.2 | length 23.4
  Top Layer w0.3: VT4.2 165.175,55.925 R16.1 169.25,55.925 170.05,55.125 175.17,55.125 177.665,57.62 177.665,65.035 176.515,66.185 CN4.7
Mute: R35.1 U3.71 | length 50.5
  Top Layer w0.3: R35.1@127.225,97.6 127.225,97.5 127.225,67.725 128.4,66.55 129.675,66.55 131.95,68.825 141.841,68.825 143.041,70.025 U3.71
NetC1_1: C1.1 C3.2 L2.2 | length 15
  Top Layer w1.27: L2.2 130.075,108.627 C1.1 132.65,107.55 C3.2
NetC2_1: C2.1 DA1.22 L2.1 | length 16.9
  Top Layer w0.5: C2.1@146.35,120.55 146.35,120.2 146.8,119.75 147.6,119.75 148.025,119.325 DA1.22 DA1.22@148.025,117.275
  Top Layer w0.508: L2.1@135.194,117.537 L2.1
  Top Layer w2: L2.1 135.581,117.15 139.375,117.15 143.15,120.925 C2.1@145.9,120.925
NetC2_2: C2.2 DA1.21 | length 3.7
  Top Layer w0.5: C2.2 148.675,120.6 DA1.21 DA1.21@148.675,117.325
NetC4_2: C4.2 DA1.5 | length 3.9
  Top Layer w0.305: C4.2@147.45,109.2 149.325,111.075 DA1.5
NetC9_1: C9.1 DA1.6 | length 3.3
  Top Layer w0.305: C9.1@149.45,109.225 149.45,110 149.975,110.525 DA1.6
NetC10_2: C10.2 DA1.7 | length 3.5
  Top Layer w0.305: DA1.7 150.625,110.925 151.7,109.85 C10.2@151.7,109.2
NetC11_1: C11.1 C15.1 L3.2 | length 16
  Top Layer w1.27: C11.1@159.225,108.075 159.75,107.55 C15.1 166.85,110.375 L3.2
NetC12_1: C12.1 DA1.16 | length 3.7
  Top Layer w0.5: DA1.16@151.925,117.3 DA1.16 151.925,120.475 C12.1
NetC12_2: C12.2 DA1.15 L3.1 | length 13
  Top Layer w0.5: DA1.15@152.575,117.3 DA1.15 152.575,119.4 152.9,119.725 153.875,119.725 154.325,120.175 C12.2
  Top Layer w0.75: L3.1@161.4,117.45 L3.1@161.45,117.4
  Top Layer w2: C12.2@154.75,120.875 157.875,120.875 L3.1
NetC14_2: C14.2 DA1.11 | length 5
  Top Layer w0.305: DA1.11 153.225,111.052 153.527,110.75 154.502,110.75 156.002,109.25 C14.2
NetC45_1: C45.1 U8.9 | length 5.1
  Top Layer w0.3: C45.1 164.625,82.775 164.2,83.2 164.2,85.575 164.5,85.875 U8.9
NetC45_2: C45.2 U8.2 | length 5.4
  Top Layer w0.3: U8.2 162.825,85.875 163.2,85.5 163.2,83.2 162.8,82.8 162.8,82.2 C45.2
NetC46_1: C46.1 U8.3 | length 2.9
  Top Layer w0.3: C46.1@158.525,85.375 U8.3
NetD2_1: D2.1 Fan1.1 Fan2.1 VT1.3 | length 11.4
  Top Layer w0.5: VT1.3 154.675,91.11 Fan1.1 154.665,91.8 160.16,91.8 160.5,91.46 Fan2.1
NetDA1_4: DA1.4 R35.2 | length 31.4
  Top Layer w0.305: R35.2 127.95,100.275 143.075,100.275 145.575,102.775 145.575,109.575 146.175,110.175 147.725,110.175 148.675,111.125 DA1.4
NetHeat_2: Heat.2 VT3.3 | length 10.4
  Top Layer w0.75: VT3.3 132.025,58.725 137.35,53.4 Heat.2
NetR12_2: R12.2 VT3.1 | length 3.2
  Top Layer w0.5: VT3.1 130.525,61.325 R12.2
NetR13_2: R13.2 VT1.1 | length 2.6
  Top Layer w0.5: R13.2 153.725,84.15 VT1.1
NetR18_2: R18.2 VT2.1 | length 2.9
  Top Layer w0.5: VT2.1 169.225,81.575 R18.2
R_OUT: C15.2 P3.1 | length 15.1
  Top Layer w1.27: C15.2 171.025,109.55 171.025,117.05 173.4,119.425 P3.1
reset: R8.1 reset.1 U3.14 | length 20.8
  Top Layer w0.3: U3.14 154.575,62.3 154.9,61.975 156.1,61.975 156.45,61.625 160.5,61.625 163.15,64.275 164.275,64.275 165.15,65.15 ; R8.1 166.475,66.475 165.15,65.15 ; reset.1 165.15,65.15
Sharp: Sharp.1 U3.7 | length 21.8
  Top Layer w0.3: Sharp.1 145.4,82.345 145.4,78.65 145.393,78.643 145.393,77.507 151.075,71.825 U3.7
SND_GND: C10.1 C27.1 DA1.8 DA1.9 P1.3 | length 13.4
  Top Layer w0.305: DA1.8 151.275,111.15 151.55,110.875 152,110.875 ; DA1.9 151.925,110.95 152,110.875 ; 152.825,106.875 152.825,110.05 152,110.875
  Top Layer w0.75: C10.1@152.025,106.875 152.825,106.875 C27.1@154.075,106.875 ; P1.3 154.005,106.805 C27.1@154.075,106.875 ; C27.1@154.1,106.85 C27.1@154.075,106.875
Tacho_fan1: Fan1.3 R9.1 U3.29 | length 57.7
  Top Layer w0.3: U3.29 163.325,69.525 165.375,71.575 165.375,73.55 163.175,75.75 v1(162.075,75.75) 161.7,76.125 R9.1 162.15,77.75 R9.1@162.075,77.675
  Bottom Layer w0.3: Fan1.3 156.775,96.54 158.285,98.05 163.175,98.05 164.45,96.775 164.45,95.261 166.325,93.386 166.325,88.461 170.125,84.661 170.125,80.175 167.538,77.588 167.538,75.587 166.475,74.525 163.3,74.525 v1(162.075,75.75)
Tacho_fan2: Fan2.3 R11.1 U3.28 | length 40.4
  Top Layer w0.3: U3.28 163.975,69.025 166.05,71.1 166.05,74.65 v1(165.1,75.6) 164.5,76.2 R11.1@164.5,77.825
  Bottom Layer w0.3: Fan2.3@162.25,96.3 Fan2.3 162.535,96.54 165.875,93.2 165.875,88.275 169.15,85 169.15,80.6 165.1,76.55 v1(165.1,75.6)
Term: P5.1 R5.1 U3.59 U3.60 | length 24.3
  Top Layer w0.3: U3.60 148.015,78.335 ; U3.59 148.575,78 148.24,78.335 148.015,78.335 ; R5.1@148.825,91.75 148.375,91.3 P5.1 144.825,91.3 142.6,89.075 142.6,85.725 144.325,84 146.5,84 147.775,82.725 147.775,78.575 148.015,78.335
udoo_uart_tx_hv: D1.2 R19.1 VT5.3 | length 26.9
  Top Layer w0.3: D1.2 140.825,58.275 155.325,58.275 155.875,58.825 159.9,58.825 R19.1 161.325,58.175 162.35,59.2 VT5.3@162.975,59.2
udoo_uart_tx_lv: CN4.5 R17.1 VT5.2 | length 12.3
  Top Layer w0.3: VT5.2 167.8,60.15 R17.1 170.025,60.2 172.15,62.325 174.77,62.325 CN4.5
pads on no net: CN3.1 CN3.2 CN3.3 CN3.4 CN3.5 CN3.6 CN3.7 CN3.8 CN3.9 CN3.10 CN3.11 CN3.12 CN3.13 CN3.14 CN3.15 CN3.16 CN3.18 CN3.20 CN4.1 CN4.2 CN4.3 CN4.4 CN4.6 CN4.8 CN4.9 CN4.10 CN4.11 CN4.12 CN4.13 CN4.14 CN4.15 CN4.16 CN5.2 CN5.4 CN5.6 CN5.8 CN5.10 CN5.11 CN5.12 CN5.13 CN5.14 CN5.15 CN5.16 CN6.1 CN6.2 CN6.3 CN6.4 CN6.5 CN6.6 CN6.7 CN6.8 CN6.9 CN6.10 CN6.11 CN6.12 U3.1 U3.2 U3.3 U3.4 U3.5 U3.6 U3.11 U3.13 U3.15 U3.16 U3.17 U3.18 U3.19 U3.20 U3.22 U3.23 U3.25 U3.26 U3.27 U3.30 U3.31 U3.32 U3.35 U3.36 U3.37 U3.38 U3.39 U3.40 U3.44 U3.45 U3.48 U3.51 U3.52 U3.53 U3.54 U3.55 U3.58 U3.61 U3.64 U3.65 U3.68 U3.69 U3.70 U3.72 U3.75
copper on no net: | length 0.6
  Top Layer w0.3: 148.015,62.79 148.015,63.375

## Polygon pours and split planes (outlines as drawn)
GND on Bottom Layer "Top Layer-No Net" (solid, remove dead copper, pour order 7): 120.2,122.706 120.2,45.25 177.625,45.25 177.625,122.706
GND on Top Layer "Top Layer-No Net" (solid, pour order 9): 177.631,122.7 177.631,45.75 120.375,45.75 120.375,122.7

## Silkscreen, mask and mechanical layers (free items; w line width, h text height)
Top Overlay:
  lines w0.254: 151.375,90.075 151.375,91.9 151.375,99.725 171.65,99.725 171.65,94.725 ; 119,44.375 119,124.075 179.006,124.075 179.006,44.375 119,44.375
  text "Audio Amp" at 132.15,121.575 h1.52
  text "ROUT" at 173.1,121.5 h1.02
  text "LOUT" at 122.425,120.625 h1.02
  text "! 12V !" at 158.8,100.225 h1.52
  text "Audio In" at 146.825,99.925 h0.52
  text "Temp" at 143.1,98.225 h0.76
  text "tx" at 166.237,93.951 h0.52
  text "rx" at 166.212,91.426 h0.52
  text "LED Out" at 148.75,56.2 h0.76
  text "+12V In" at 125.325,55.975 h0.76
  text "Murinets" at 158.05,51.15 h1.52
  text "www.noon3d.ru" at 158.05,49.425 h1.02
  text "murinets.d@ya.ru" at 158.055,47.765 h1.2 r359.57
  text "v2.1, 2018" at 158.05,45.959 h1